# Altium PCB ProximityDetector.PcbDoc
Units mil, origin at the board's own origin, x right, y up, seen from the top; angles counter-clockwise.
Board outline 5915.03 x 5925.03 mil, 2 copper layers (Top Layer, Bottom Layer); 12 components, 9 nets, 33 pads, 1 vias.
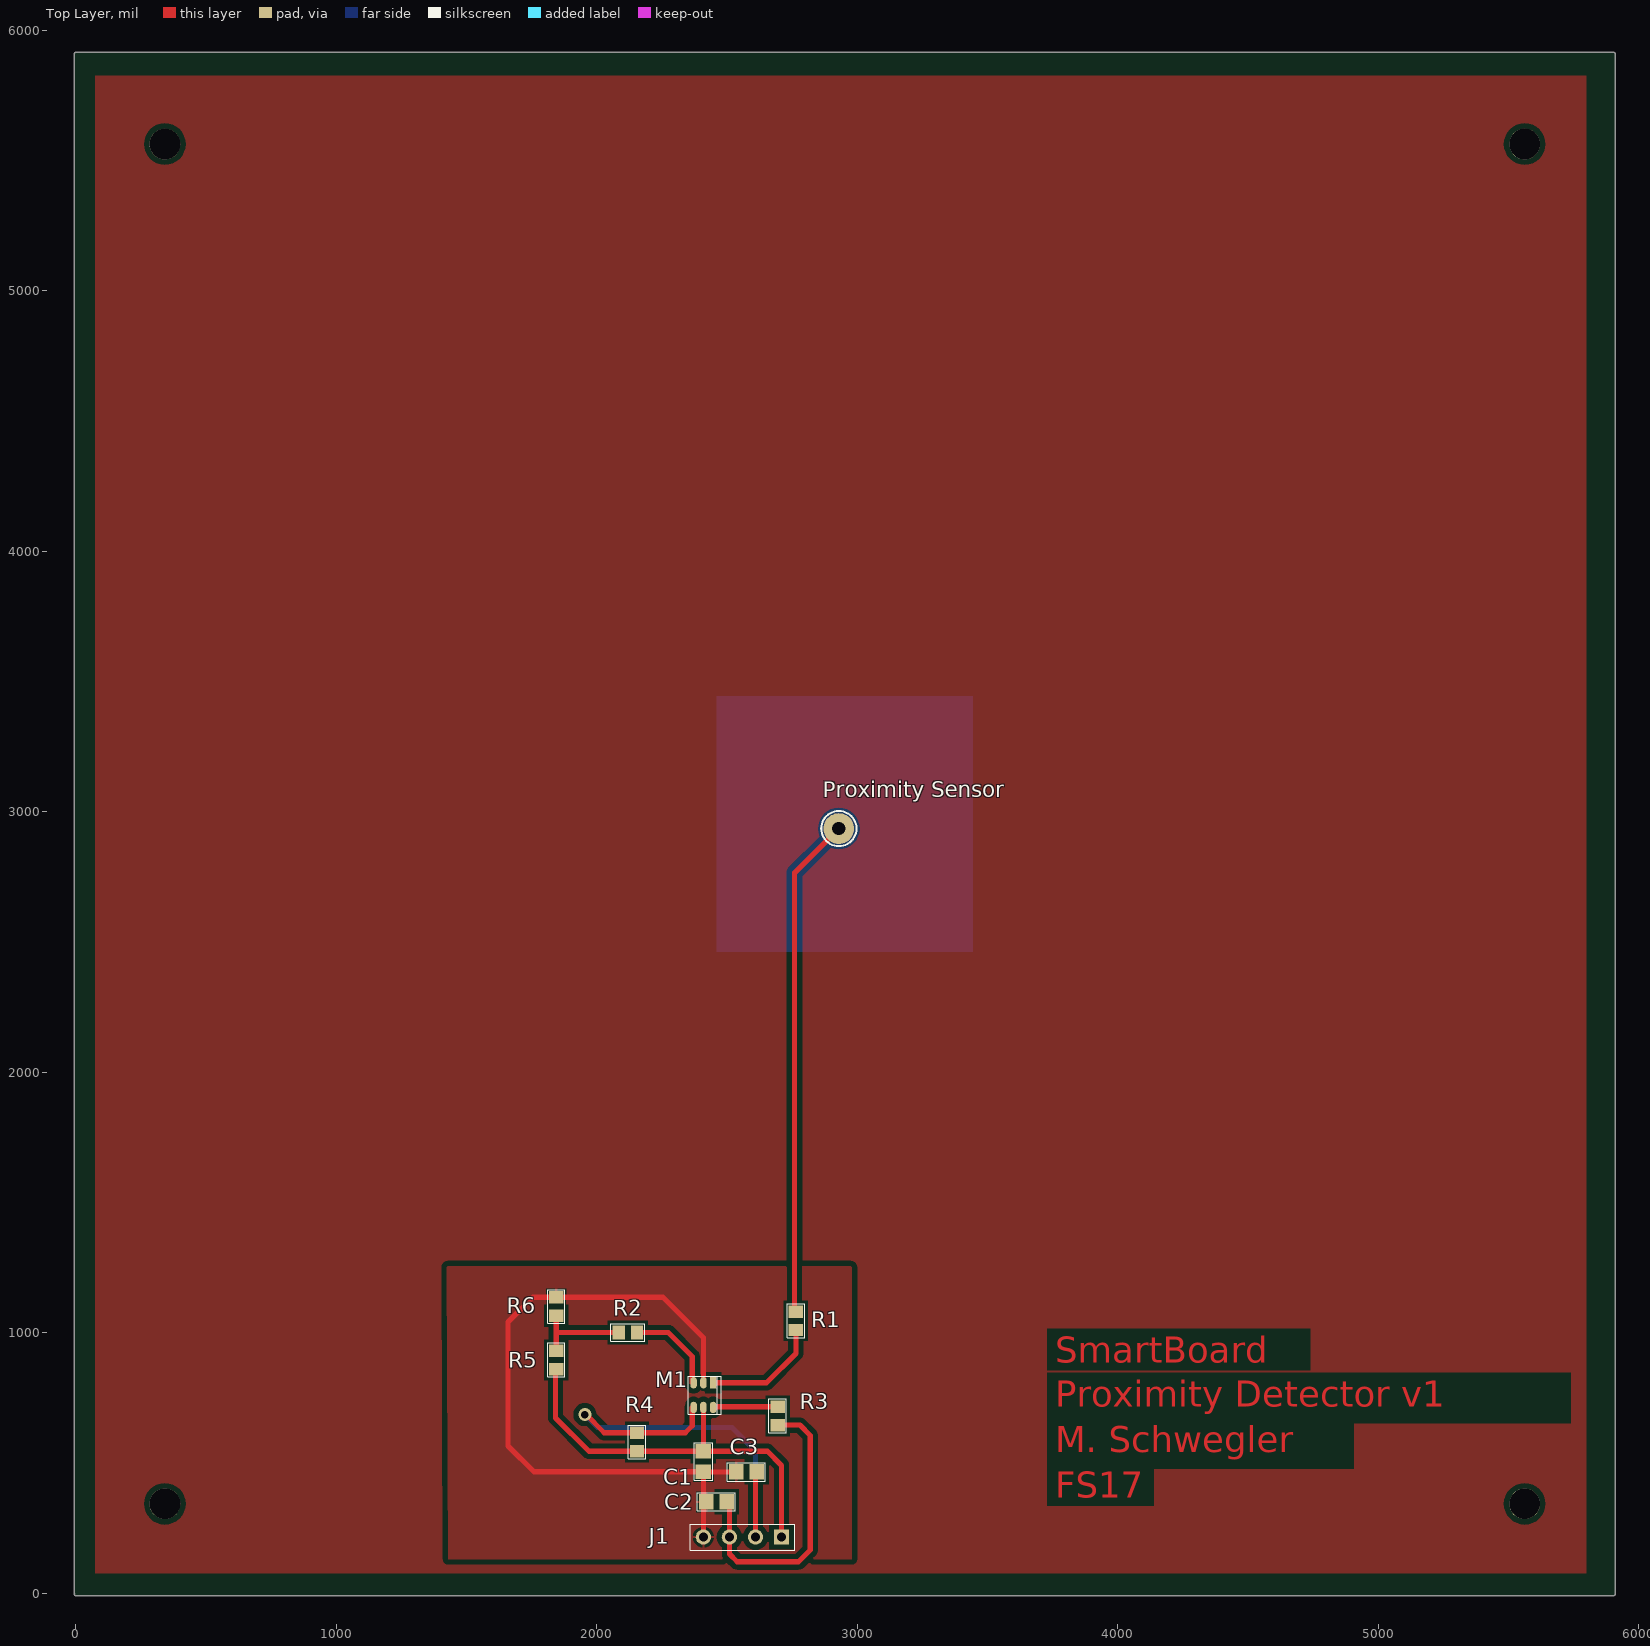
[diagram p0: Top Layer view]
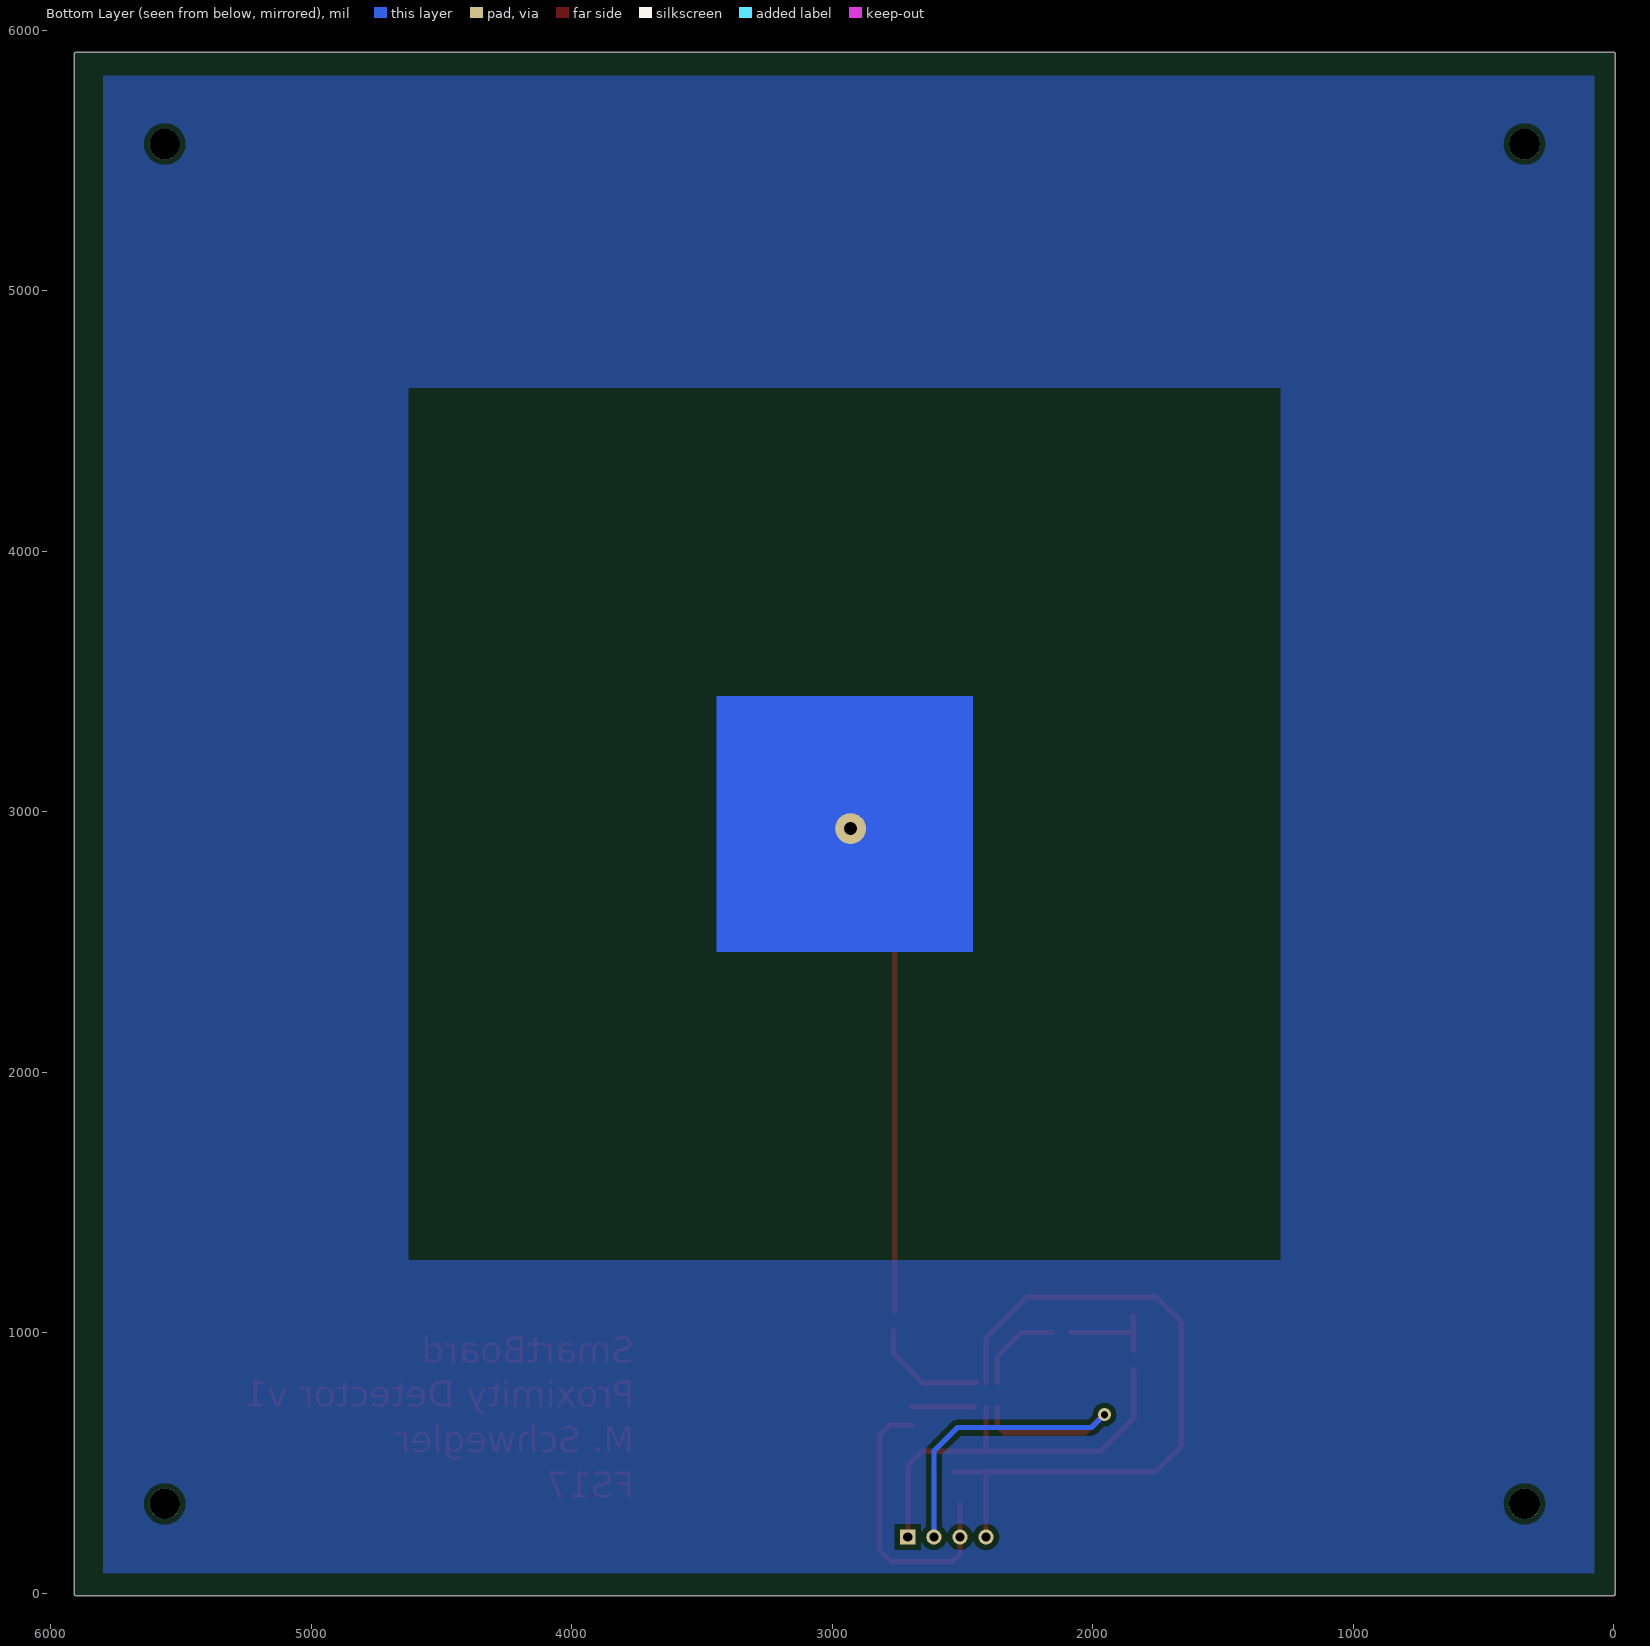
[diagram p1: Bottom Layer view, seen from below]
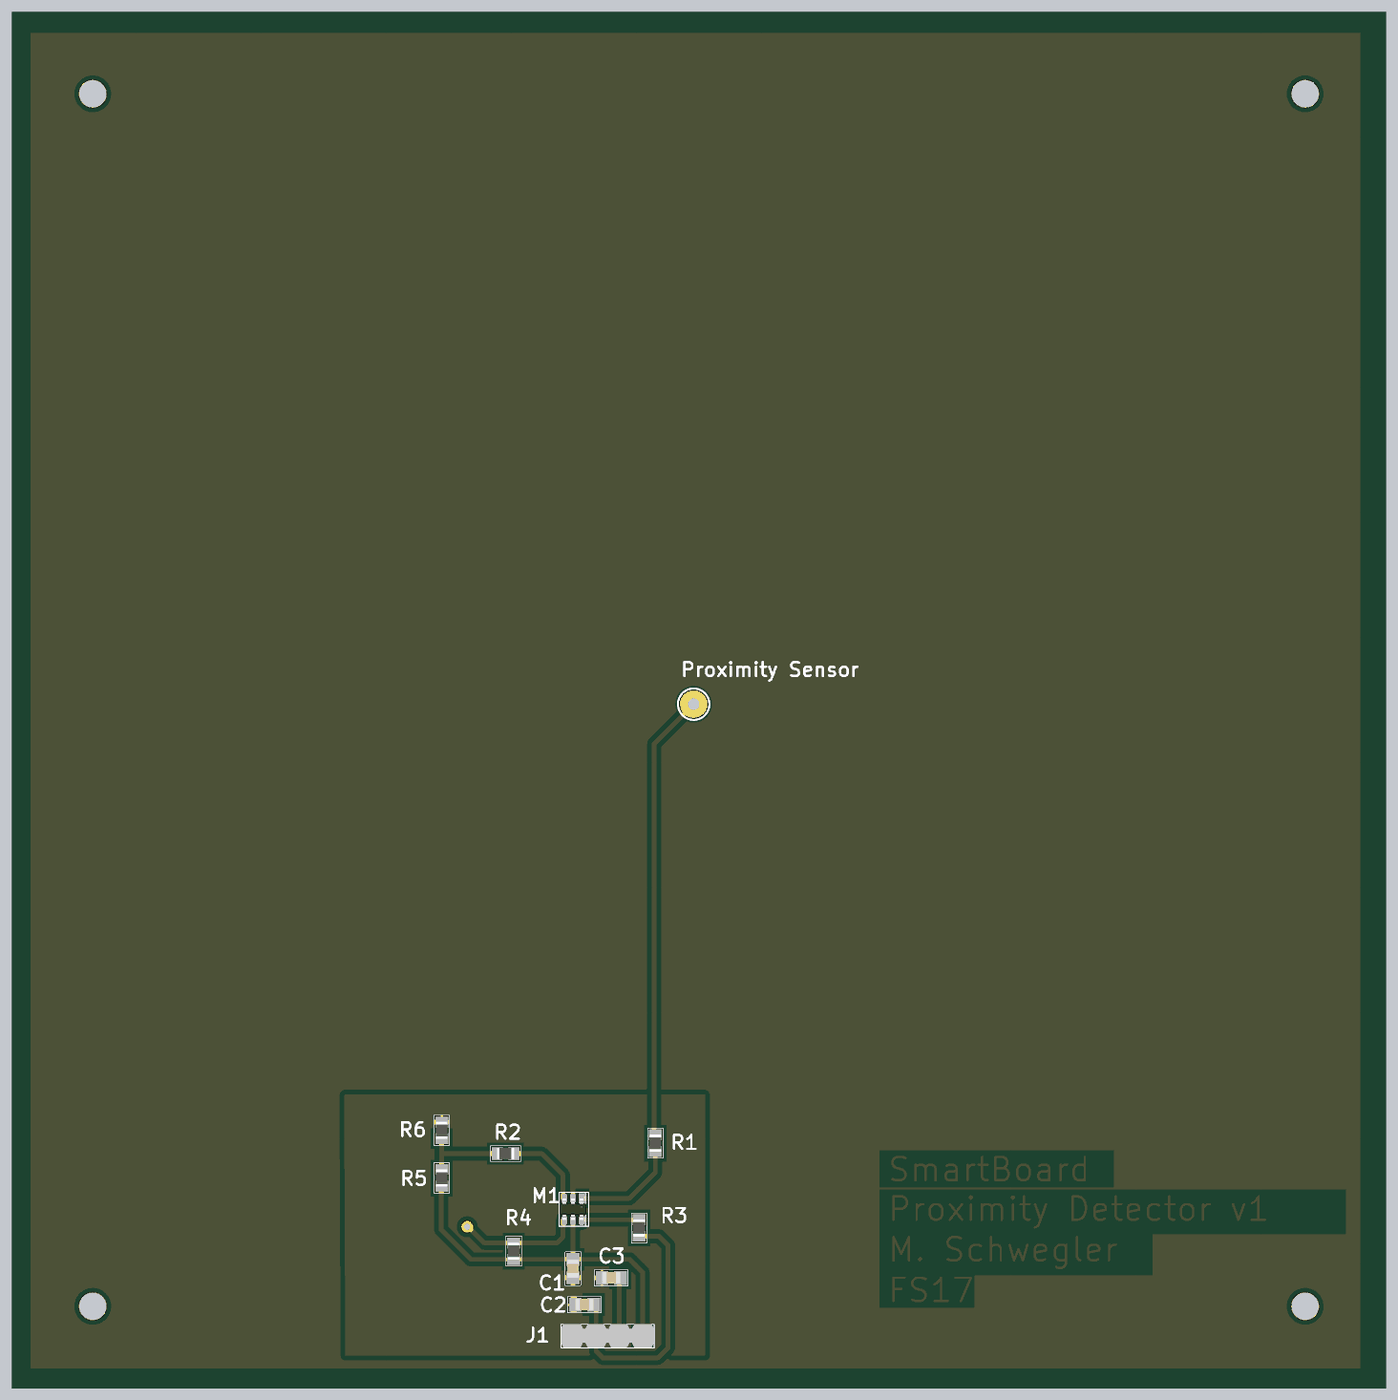
[diagram p2: 3D render of the assembled board from above, using the file's embedded part models]

## Layer stack, top to bottom
Top Solder: solder mask 0.4, Solder Resist, Dk 3.5
Top Layer: signal copper 1.4
Dielectric 1: dielectric 12.6, FR-4, Dk 4.8
Bottom Layer: signal copper 1.4
Bottom Solder: solder mask 0.4, Solder Resist, Dk 3.5

## Board outline
-4.35,-2.5 cw(c0,0) -5.01,0 -5.01,5910 cw(c0,5910) 0,5915.02 5905,5915.02 cw(c5905,5910) 5910.02,5910 5910.02,-5 cw(c5905,-5) 5905,-10.01 0,-10.01 cw(c0,-5)

## Design rules (kind name [scope] priority, off if disabled: settings)
Clearance [All] p1: gap=20
PolygonConnect [All] p1: connectstyle=Relief reliefconductorwidth=10 reliefentries=4 polygonreliefangle="90 Angle" airgapwidth=10
RoomDefinition ProximityDetector [InComponentClass('ProximityDetector')] p1: confinementstyle=ConfineIn formatcopy=TRUE lockcomponents=FALSE outline 0,0 5905,0 5905,5905 0,5905
RoutingVias [All] p1: holewidth=28 width=50 viastyle="Through Hole" minholewidth=28 minwidth=50 maxholewidth=28 maxwidth=50
SolderMaskExpansion [All] p1: expansion=4
UnpouredPolygon [All] p1: allowunpoured=FALSE
Width [All] p1: maxlimit=20 minlimit=20 preferedwidth=20
29 further rules are at their usual default settings.

## Components (designator, comment, footprint, x,y, rotation, side; value= is the part's Value field where it differs from the comment)
C1 "100n" 0805_C 2410,505 r90 top
C2 "10p" 0805_C 2460,350 r0 top
C3 "10p" 0805_C 2575,465 r0 top
J1 "Value" CON_THT_4P_RM2.54 2560,215 r180 top
M1 "MTCH101" SOT23-6 2410,760 r270 top
"Proximity Sensor" "Detector" Hole_1.3mm 2930,2935 r90 top
R1 "4.7k" 0805_R 2765,1045 r270 top
R2 "10k" 0805_R 2120,1000 r0 top
R3 "4.7k" 0805_R 2695,680 r270 top
R4 "4.7k" 0805_R 2155,580 r270 top
R5 "220k" 0805_R 1845,895 r270 top
R6 "220k" 0805_R 1845,1100 r270 top

## Footprints (in the part's own frame and the unit in brackets; to place one, negate y for a bottom-side part, rotate by r counter-clockwise, add the part's x,y. Pads: shape width x height; smd on the part's side, far side on the other; paste and mask are expansions set on the pad)
0805_C [mm] "Chip Capasitor - 0805 Medium"
  rect 1.4x1.5 smd: 1(-1,0) 2(1,0)
  silkscreen extent -1.85,-0.89 1.84,0.87, body extent -1,-0.62 1,0.62, height 0.59
0805_R [mm] "Chip Resistor - 0805 Normal"
  rect 1.2x1.4 smd: 1(-0.9,0) 2(0.9,0)
  silkscreen extent -1.65,-0.85 1.65,0.85, body extent -0.95,-0.65 0.95,0.65, height 0.63
CON_THT_4P_RM2.54 [mm] "Connector; Header; 6 Position"
  rect 1.5x1.5 hole 0.9: 1(-3.81,0)
  round 1.5 hole 0.9: 2(-1.27,0) 3(1.27,0) 4(3.81,0)
  silkscreen extent -5.08,-1.27 5.09,1.3, body extent -5.05,-1.3 5.11,1.24, height 9.27
Hole_1.3mm [mm] "Mechanical hole, 1.3 mm, 3 mm pad appature"
  round 3 hole 1.3: 1(0,0)
  silkscreen extent -1.72,-1.72 1.72,1.72
SOT23-6 [mm] "SOT23, 6-Leads, Body 2.9x1.6mm, Pitch 0.95mm, Lead Span 2.8mm, IPC Medium Density"
  rect 1.1x0.65 smd: 1(-1.2,0.95)
  oval 1.1x0.65 smd: 2(-1.2,0) 3(-1.2,-0.95) 4(1.2,-0.95) 5(1.2,0) 6(1.2,0.95)
  silkscreen extent -1.85,-1.49 1.85,1.75, body extent -1.19,-1.46 1.15,1.47, height 1

## Part data
C1 C2 C3: library part Cap, "Cap"
J1: library part CON_4P
R1 R2 R3 R4 R5 R6: library part Res, "Res"

## Free pads (board coordinates)
  round 118.11 hole 118.11: 1(342.52,342.52) 1(342.52,5562.99) 1(5562.99,342.52) 1(5562.99,5562.99)

## Via types
v1: diameter 50, hole 28, Top Layer to Bottom Layer, 1 vias

## Nets (pads, with @x,y where several pads share a name; then routed paths per layer and width w, separated by ;. In a path a pad name is that pad's centre, name@x,y a point inside that pad or via, vN(x,y) a via of type N, cw(c..) or ccw(c..) an arc to the next point about the centre after c; other vN are vias at no path point)
3V3: C1.2 J1.1 M1.5 R4.2 R5.2 | length 1570.8
  Top Layer w20: R5.2@1842.5,857.07 1842.5,672.5 1970.43,544.57 R4.2 ; R4.2@2155.2,544.37 C1.2 ; M1.5 C1.2 ; J1.1 2710,490 2655.63,544.37 C1.2
GND: C1.1 C2.1 C3.1 J1.4 M1.2 R6.1 | length 2678.7
  Top Layer w20: J1.4@2410,205.63 2410,310 C1.1 ; M1.2 2410,980 2254.57,1135.43 R6.1 1755.43,1135.43 1660,1040 1660,565 1759.37,465.63 C1.1 ; C3.1 2410.63,465 C1.1
MTCH101_OUT: C3.2 J1.2 M1.4 R4.1 | length 1817.7
  Top Layer w20: v1@1955,690 2029.57,615.43 R4.1 2340.43,615.43 2367.2,642.2 M1.4@2367.2,712.76 ; J1.2 C3.2@2610,465
  Bottom Layer w20: v1(1955,685) 2005,635 2520,635 2610,545 J1.2
MTCH101_POWERMODE: C2.2 J1.3 R3.2 | length 1111.8
  Top Layer w20: C2.2@2510,339.37 J1.3 2510,150 2540,120 2775,120 2820,165 2820,605 2780.43,644.57 R3.2
NetM1_1: M1.1 R1.2 | length 453.9
  Top Layer w20: M1.1 2652.24,807.24 2765,920 R1.2
NetM1_3: M1.3 R2.2 | length 350.5
  Top Layer w20: R2.2 2275,1000 2367.2,907.8 M1.3@2367.2,807.24
NetM1_6: M1.6 R3.1 | length 243.3
  Top Layer w20: M1.6@2452.8,712.76 2455.47,715.43 R3.1
"NetProximity Sensor_1": "Proximity Sensor.1" R1.1 | length 1925
  Top Layer w20: R1.1@2760,1080.43 2760,2765 2930,2935
NetR2_1: R2.1 R5.1 R6.2 | length 373.7
  Top Layer w20: R5.1 1845,1000 ; R6.2 1845,1000 ; R2.1 1845,1000

## Polygon pours and split planes (outlines as drawn)
GND on Top Layer "Top Layer-No Net" (solid, pour order 4): 1430,130 2980,130 2980,905 2980,1255 1425,1255
no net on Top Layer "Top Layer-No Net" (solid, pour order 6): 75,75 5800,75 5800,5825 75,5825
no net on Bottom Layer "Top Layer-No Net" (solid, pour order 8): 75,75 5800,75 5800,5825 75,5825 75,5820

## Other copper
Top Layer:
  text "SmartBoard" at 3760,885 h100
  text "Proximity Detector v1" at 3760,715 h100
  text "M. Schwegler" at 3760,540 h100
  text "FS17" at 3760,365 h100
Bottom Layer:
  rectangle net "NetProximity Sensor_1": 2460.63,2460.63 3444.88,3444.88
  pour cut-out: 1279.53,1279.53 4625.98,1279.53 4625.98,4625.98 1279.53,4625.98

## Silkscreen, mask and mechanical layers (free items; w line width, h text height)
Mechanical 1:
  lines w20: 0,-5 5905,-5 5905,5910 0,5910 0,0